# Altium PCB STM32F4xxZ.PcbDoc
Units mil, origin at the board's own origin, x right, y up, seen from the top; angles counter-clockwise.
Board outline not stored, 2 copper layers (Top Layer, Bottom Layer); 25 components, 0 nets, 195 pads, 0 vias.
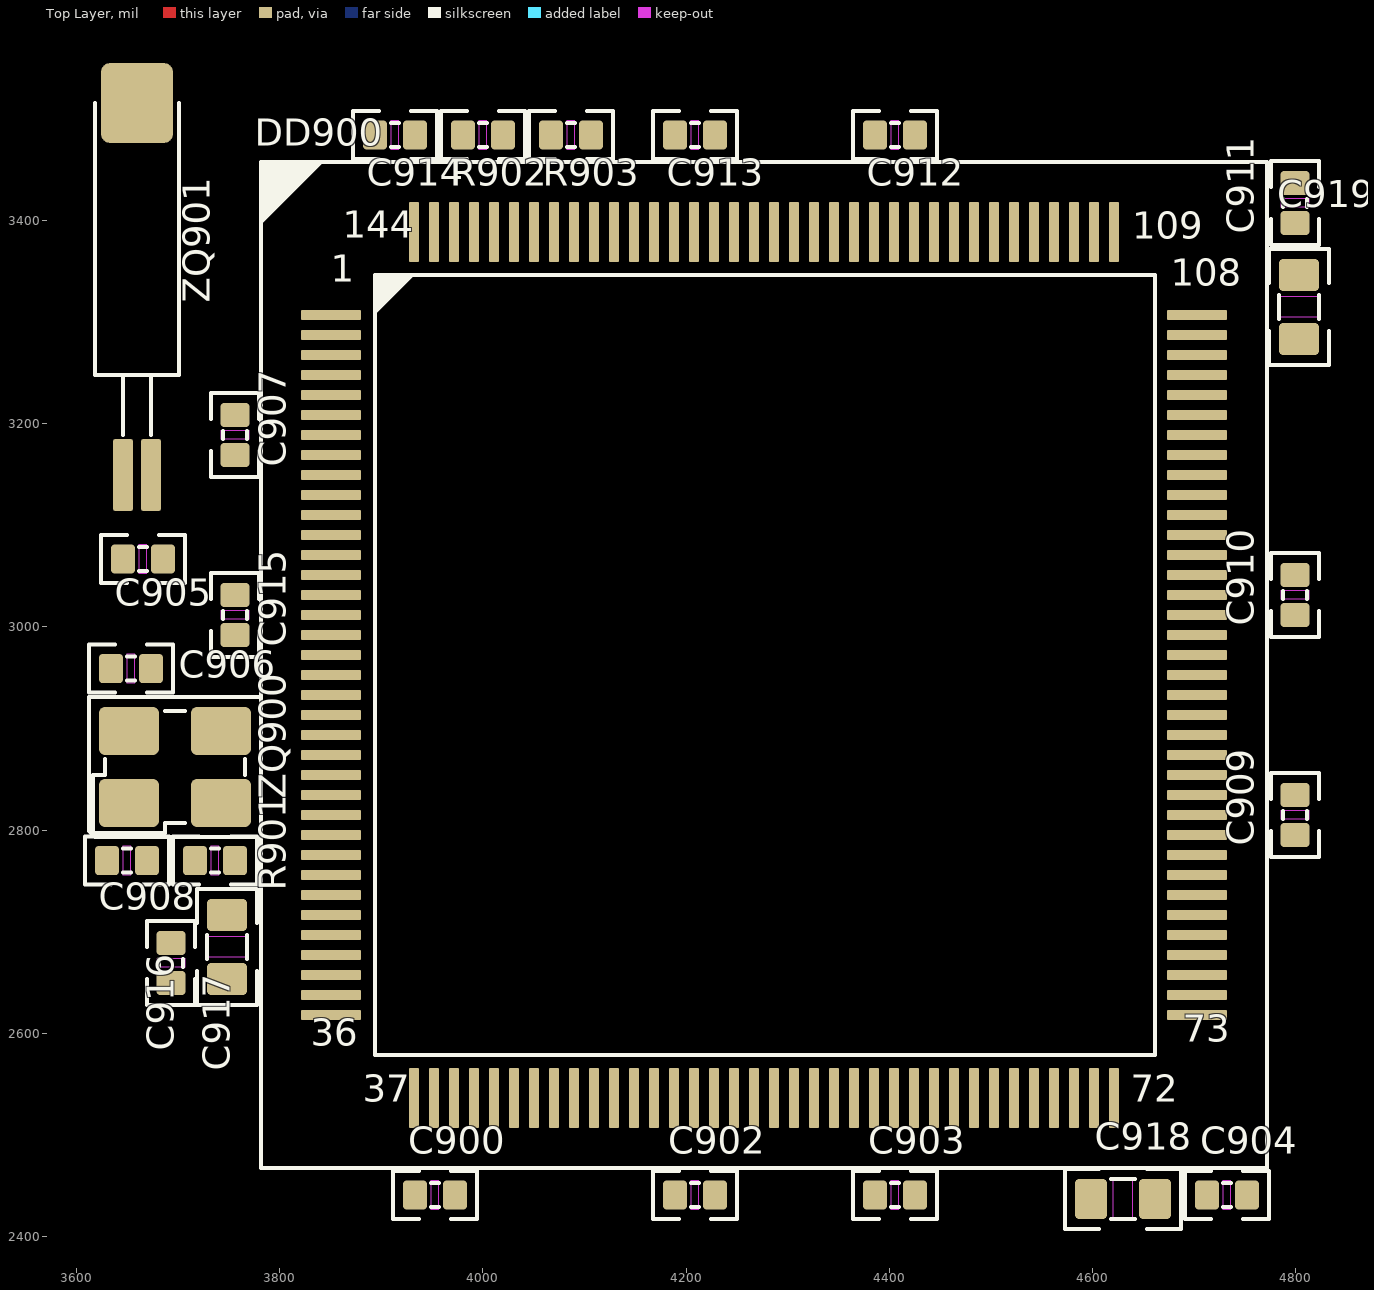
[diagram p0: Top Layer view]
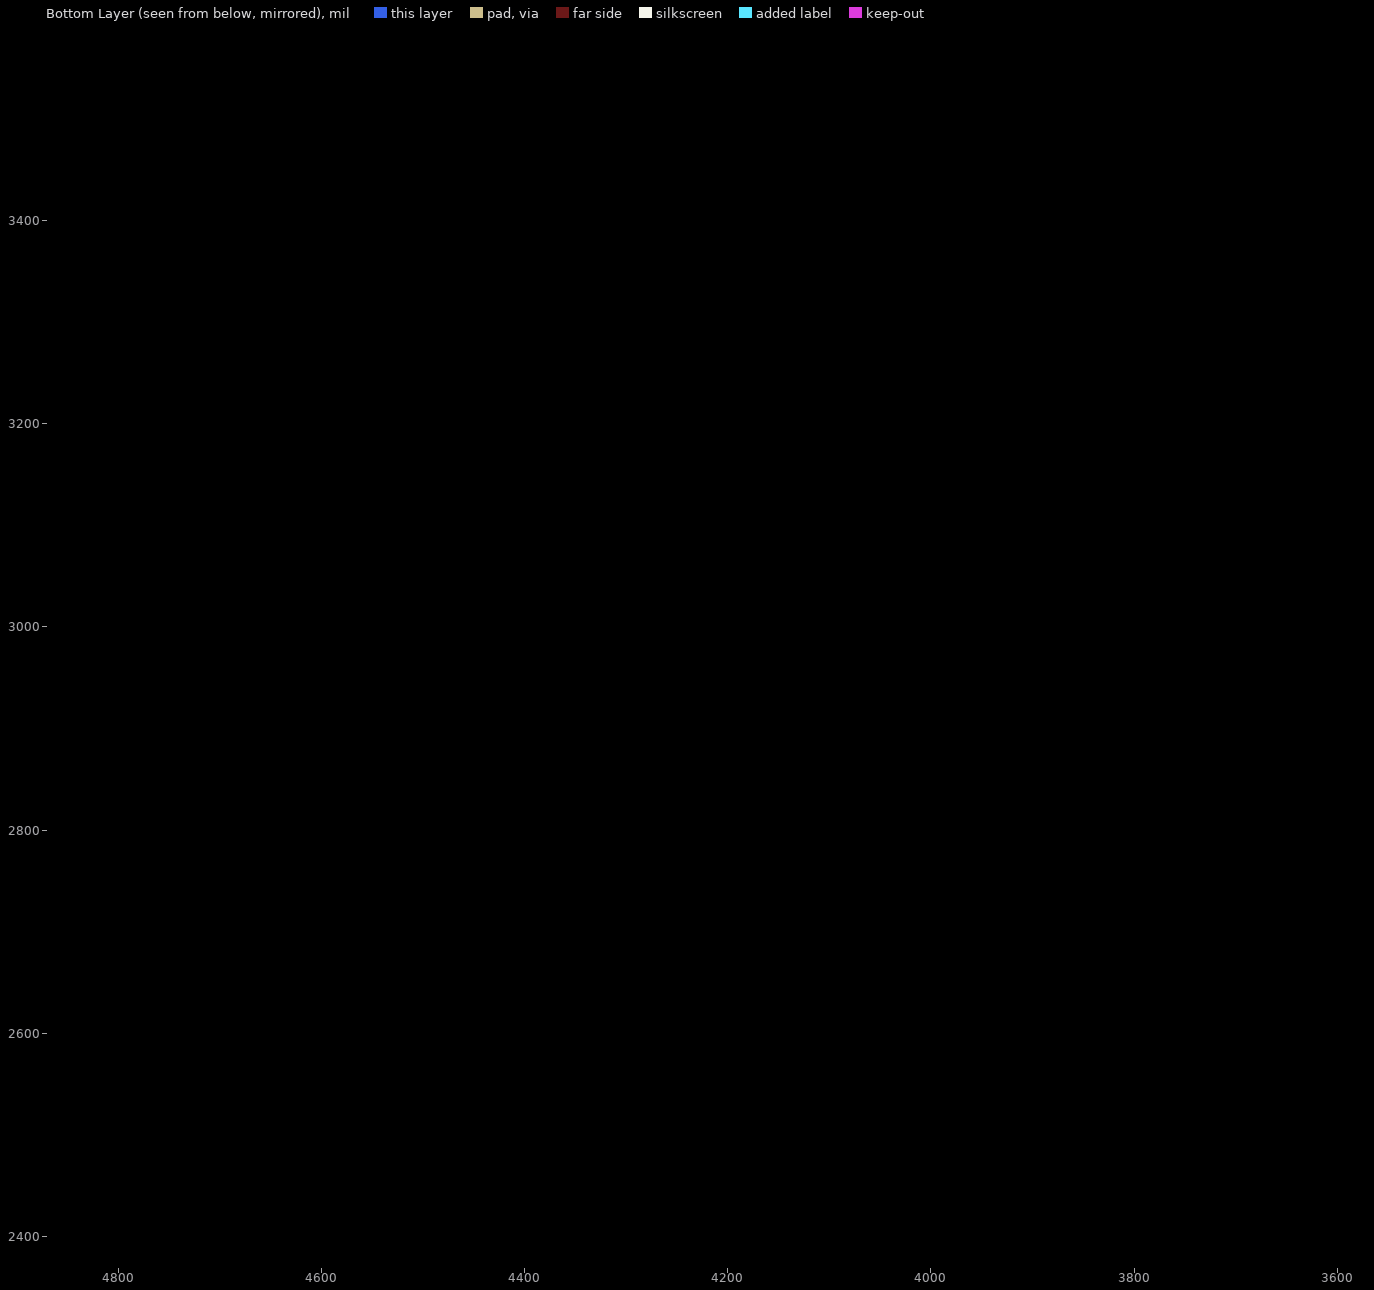
[diagram p1: Bottom Layer view, seen from below]

## Layer stack, top to bottom
Top Solder: solder mask 0.4, Solder Resist, Dk 3.5
Top Layer: signal copper 1.4
Dielectric 1: dielectric 12.6, FR-4, Dk 4.8
Bottom Layer: signal copper 1.4
Bottom Solder: solder mask 0.4, Solder Resist, Dk 3.5

## Components (designator, comment, footprint, x,y, rotation, side; value= is the part's Value field where it differs from the comment)
C900 "0,1" CAP0402 3952.76,2440.94 r180 top
C902 "0,1" CAP0402 4208.66,2440.94 r180 top
C903 "0,1" CAP0402 4405.51,2440.94 r180 top
C904 "0,1" CAP0402 4732.28,2440.94 r180 top
C905 "6,8pF" CAP0402 3665.35,3066.93 r180 top
C906 "20" CAP0402 3653.54,2959.06 r180 top
C907 "6,8pF" CAP0402 3755.91,3188.98 r90 top
C908 "20" CAP0402 3649.61,2770.08 r180 top
C909 "0,1" CAP0402 4799.21,2814.96 r270 top
C910 "0,1" CAP0402 4799.21,3031.5 r270 top
C911 "0,1" CAP0402 4799.21,3417.32 r270 top
C912 "0,1" CAP0402 4405.51,3484.25 r0 top
C913 "0,1" CAP0402 4208.66,3484.25 r0 top
C914 "0,1" CAP0402 3913.39,3484.25 r180 top
C915 "0,1" CAP0402 3755.91,3011.81 r90 top
C916 "0,1" CAP0402 3692.91,2669.29 r90 top
C917 "4,7" CAP0603 3748.03,2685.04 r90 top
C918 "2,2" CAP0603 4629.92,2437.01 r0 top
C919 "2,2" CAP0603 4803.15,3314.96 r90 top
DD900 "STM32F429ZGT6" LQFP144 3850.39,3307.09 r0 top
R901 "220" RES0402 3736.22,2770.08 r0 top
R902 "10K" RES0402 4000,3484.25 r180 top
R903 "1K" RES0402 4086.61,3484.25 r0 top
ZQ900 "12MHz" KX-7 3696.85,2862.2 r0 top
ZQ901 "32768Hz" "OSC РК206 AA SMD" 3673.23,3149.61 r270 top

## Footprints (in the part's own frame and the unit in brackets; to place one, negate y for a bottom-side part, rotate by r counter-clockwise, add the part's x,y. Pads: shape width x height; smd on the part's side, far side on the other; paste and mask are expansions set on the pad)
CAP0402 [mm]
  rrect25% 0.59x0.72 smd: 1(-0.5,0) 2(0.5,0)
  Top Layer keep-out region: -0.1,0.36 -0.1,-0.36 0.1,-0.36 0.1,0.36
  silkscreen extent -1.05,-0.6 1.05,0.6, body extent -0.5,-0.25 0.5,0.25, height 0.49
CAP0603 [mm]
  rrect25% 0.8x1 smd: 1(-0.8,0) 2(0.8,0)
  Top Layer keep-out region: -0.25,0.5 -0.25,-0.5 0.25,-0.5 0.25,0.5
  silkscreen extent -1.45,-0.75 1.45,0.75, body extent -0.8,-0.4 0.8,0.4, height 0.65
KX-7 [mm]
  rrect25% 1.5x1.2 smd: 1(-1.15,-0.9) 2(1.15,-0.9) 3(1.15,0.9) 4(-1.15,0.9)
  silkscreen extent -2.15,-1.75 2.15,1.75, body extent -1.6,-1.25 1.6,1.25, height 1.21
LQFP144 [mm]
  rrect25% 1.5x0.25 smd mask+0.05: 1(0,0) 2(0,-0.5) 3(0,-1) 4(0,-1.5) 5(0,-2) 6(0,-2.5) 7(0,-3) 8(0,-3.5) 9(0,-4) 10(0,-4.5) 11(0,-5) 12(0,-5.5) 13(0,-6) 14(0,-6.5) 15(0,-7) 16(0,-7.5) 17(0,-8) 18(0,-8.5) 19(0,-9) 20(0,-9.5) 21(0,-10) 22(0,-10.5) 23(0,-11) 24(0,-11.5) 25(0,-12) 26(0,-12.5) 27(0,-13) 28(0,-13.5) 29(0,-14) 30(0,-14.5) 31(0,-15) 32(0,-15.5) 33(0,-16) 34(0,-16.5) 35(0,-17) 36(0,-17.5) 73(21.65,-17.5) 74(21.65,-17) 75(21.65,-16.5) 76(21.65,-16) 77(21.65,-15.5) 78(21.65,-15) 79(21.65,-14.5) 80(21.65,-14) 81(21.65,-13.5) 82(21.65,-13) 83(21.65,-12.5) 84(21.65,-12) 85(21.65,-11.5) 86(21.65,-11) 87(21.65,-10.5) 88(21.65,-10) 89(21.65,-9.5) 90(21.65,-9) 91(21.65,-8.5) 92(21.65,-8) 93(21.65,-7.5) 94(21.65,-7) 95(21.65,-6.5) 96(21.65,-6) 97(21.65,-5.5) 98(21.65,-5) 99(21.65,-4.5) 100(21.65,-4) 101(21.65,-3.5) 102(21.65,-3) 103(21.65,-2.5) 104(21.65,-2) 105(21.65,-1.5) 106(21.65,-1) 107(21.65,-0.5) 108(21.65,0)
  rrect25% 0.25x1.5 smd mask+0.05: 37(2.075,-19.575) 38(2.575,-19.575) 39(3.075,-19.575) 40(3.575,-19.575) 41(4.075,-19.575) 42(4.575,-19.575) 43(5.075,-19.575) 44(5.575,-19.575) 45(6.075,-19.575) 46(6.575,-19.575) 47(7.075,-19.575) 48(7.575,-19.575) 49(8.075,-19.575) 50(8.575,-19.575) 51(9.075,-19.575) 52(9.575,-19.575) 53(10.075,-19.575) 54(10.575,-19.575) 55(11.075,-19.575) 56(11.575,-19.575) 57(12.075,-19.575) 58(12.575,-19.575) 59(13.075,-19.575) 60(13.575,-19.575) 61(14.075,-19.575) 62(14.575,-19.575) 63(15.075,-19.575) 64(15.575,-19.575) 65(16.075,-19.575) 66(16.575,-19.575) 67(17.075,-19.575) 68(17.575,-19.575) 69(18.075,-19.575) 70(18.575,-19.575) 71(19.075,-19.575) 72(19.575,-19.575) 109(19.575,2.075) 110(19.075,2.075) 111(18.575,2.075) 112(18.075,2.075) 113(17.575,2.075) 114(17.075,2.075) 115(16.575,2.075) 116(16.075,2.075) 117(15.575,2.075) 118(15.075,2.075) 119(14.575,2.075) 120(14.075,2.075) 121(13.575,2.075) 122(13.075,2.075) 123(12.575,2.075) 124(12.075,2.075) 125(11.575,2.075) 126(11.075,2.075) 127(10.575,2.075) 128(10.075,2.075) 129(9.575,2.075) 130(9.075,2.075) 131(8.575,2.075) 132(8.075,2.075) 133(7.575,2.075) 134(7.075,2.075) 135(6.575,2.075) 136(6.075,2.075) 137(5.575,2.075) 138(5.075,2.075) 139(4.575,2.075) 140(4.075,2.075) 141(3.575,2.075) 142(3.075,2.075) 143(2.575,2.075) 144(2.075,2.075)
  silkscreen extent -1.75,-21.32 23.4,3.83, body extent -0.18,-19.75 21.83,2.25, height 1.68
"OSC РК206 AA SMD" [mm]
  rrect25% 1.8x0.5 smd: 1(0,0) 2(0,-0.7)
  rrect25% 2x1.8 smd: 3(-9.3,-0.35)
  silkscreen extent -9.3,-1.4 -1,0.7, body extent -9.3,-1.36 0,0.67, height 2.03
RES0402 [mm]
  rrect25% 0.59x0.72 smd: 1(-0.5,0) 2(0.5,0)
  Top Layer keep-out region: -0.1,0.36 -0.1,-0.36 0.1,-0.36 0.1,0.36
  silkscreen extent -1.05,-0.6 1.05,0.6, body extent -0.5,-0.25 0.5,0.25, height 0.33

## Part data
C900 C902 C903 C904 C905 C906 C907 C908 C909 C910 C911 C912 C913 C914 C915 C916: library part CAP_0402, "Конденсатор чип"
C917 C918 C919: library part CAP_0603, "Конденсатор чип"
DD900: library part STM32F4xxZ, "Микроконтроллер"
R901 R902 R903: library part RES_0402, "Резистор чип"
ZQ900: library part KX-7, "Кварц"
ZQ901: library part "OSC РК206 AA 32.768KHZ", "Кварц"

## Nets (pads, with @x,y where several pads share a name; then routed paths per layer and width w, separated by ;. In a path a pad name is that pad's centre, name@x,y a point inside that pad or via, vN(x,y) a via of type N, cw(c..) or ccw(c..) an arc to the next point about the centre after c; other vN are vias at no path point)
pads on no net: C900.1 C900.2 C902.1 C902.2 C903.1 C903.2 C904.1 C904.2 C905.1 C905.2 C906.1 C906.2 C907.1 C907.2 C908.1 C908.2 C909.1 C909.2 C910.1 C910.2 C911.1 C911.2 C912.1 C912.2 C913.1 C913.2 C914.1 C914.2 C915.1 C915.2 C916.1 C916.2 C917.1 C917.2 C918.1 C918.2 C919.1 C919.2 DD900.1 DD900.2 DD900.3 DD900.4 DD900.5 DD900.6 DD900.7 DD900.8 DD900.9 DD900.10 DD900.11 DD900.12 DD900.13 DD900.14 DD900.15 DD900.16 DD900.17 DD900.18 DD900.19 DD900.20 DD900.21 DD900.22 DD900.23 DD900.24 DD900.25 DD900.26 DD900.27 DD900.28 DD900.29 DD900.30 DD900.31 DD900.32 DD900.33 DD900.34 DD900.35 DD900.36 DD900.37 DD900.38 DD900.39 DD900.40 DD900.41 DD900.42 DD900.43 DD900.44 DD900.45 DD900.46 DD900.47 DD900.48 DD900.49 DD900.50 DD900.51 DD900.52 DD900.53 DD900.54 DD900.55 DD900.56 DD900.57 DD900.58 DD900.59 DD900.60 DD900.61 DD900.62 DD900.63 DD900.64 DD900.65 DD900.66 DD900.67 DD900.68 DD900.69 DD900.70 DD900.71 DD900.72 DD900.73 DD900.74 DD900.75 DD900.76 DD900.77 DD900.78 DD900.79 DD900.80 DD900.81 DD900.82 DD900.83 DD900.84 DD900.85 DD900.86 DD900.87 DD900.88 DD900.89 DD900.90 DD900.91 DD900.92 DD900.93 DD900.94 DD900.95 DD900.96 DD900.97 DD900.98 DD900.99 DD900.100 DD900.101 DD900.102 DD900.103 DD900.104 DD900.105 DD900.106 DD900.107 DD900.108 DD900.109 DD900.110 DD900.111 DD900.112 DD900.113 DD900.114 DD900.115 DD900.116 DD900.117 DD900.118 DD900.119 DD900.120 DD900.121 DD900.122 DD900.123 DD900.124 DD900.125 DD900.126 DD900.127 DD900.128 DD900.129 DD900.130 DD900.131 DD900.132 DD900.133 DD900.134 DD900.135 DD900.136 DD900.137 DD900.138 DD900.139 DD900.140 DD900.141 DD900.142 DD900.143 DD900.144 R901.1 R901.2 R902.1 R902.2 R903.1 R903.2 ZQ900.1 ZQ900.2 ZQ900.3 ZQ900.4 ZQ901.1 ZQ901.2 ZQ901.3

## Text inside footprints (layer, text, board x,y; h text height)
DD900: Top Overlay "109" at 4639.17,3373.23 h45.28; Top Overlay "108" at 4677.17,3326.77 h45.28; Top Overlay "73" at 4688.98,2582.68 h45.28; Top Overlay "72" at 4637.8,2523.62 h45.28; Top Overlay "1" at 3850.39,3330.71 h45.28; Top Overlay "144" at 3862.2,3374.02 h45.28; Top Overlay "37" at 3881.89,2523.62 h45.28; Top Overlay "36" at 3830.71,2578.74 h45.28